# Altium PCB 开发板.PcbDoc
Units mil, origin at the board's own origin, x right, y up, seen from the top; angles counter-clockwise.
Board outline 3732.01 x 2830 mil, 4 copper layers (Top Layer, Internal Plane 1, Internal Plane 2, Bottom Layer), stack 18.2 mil thick; 39 components, 160 nets, 399 pads, 61 vias.
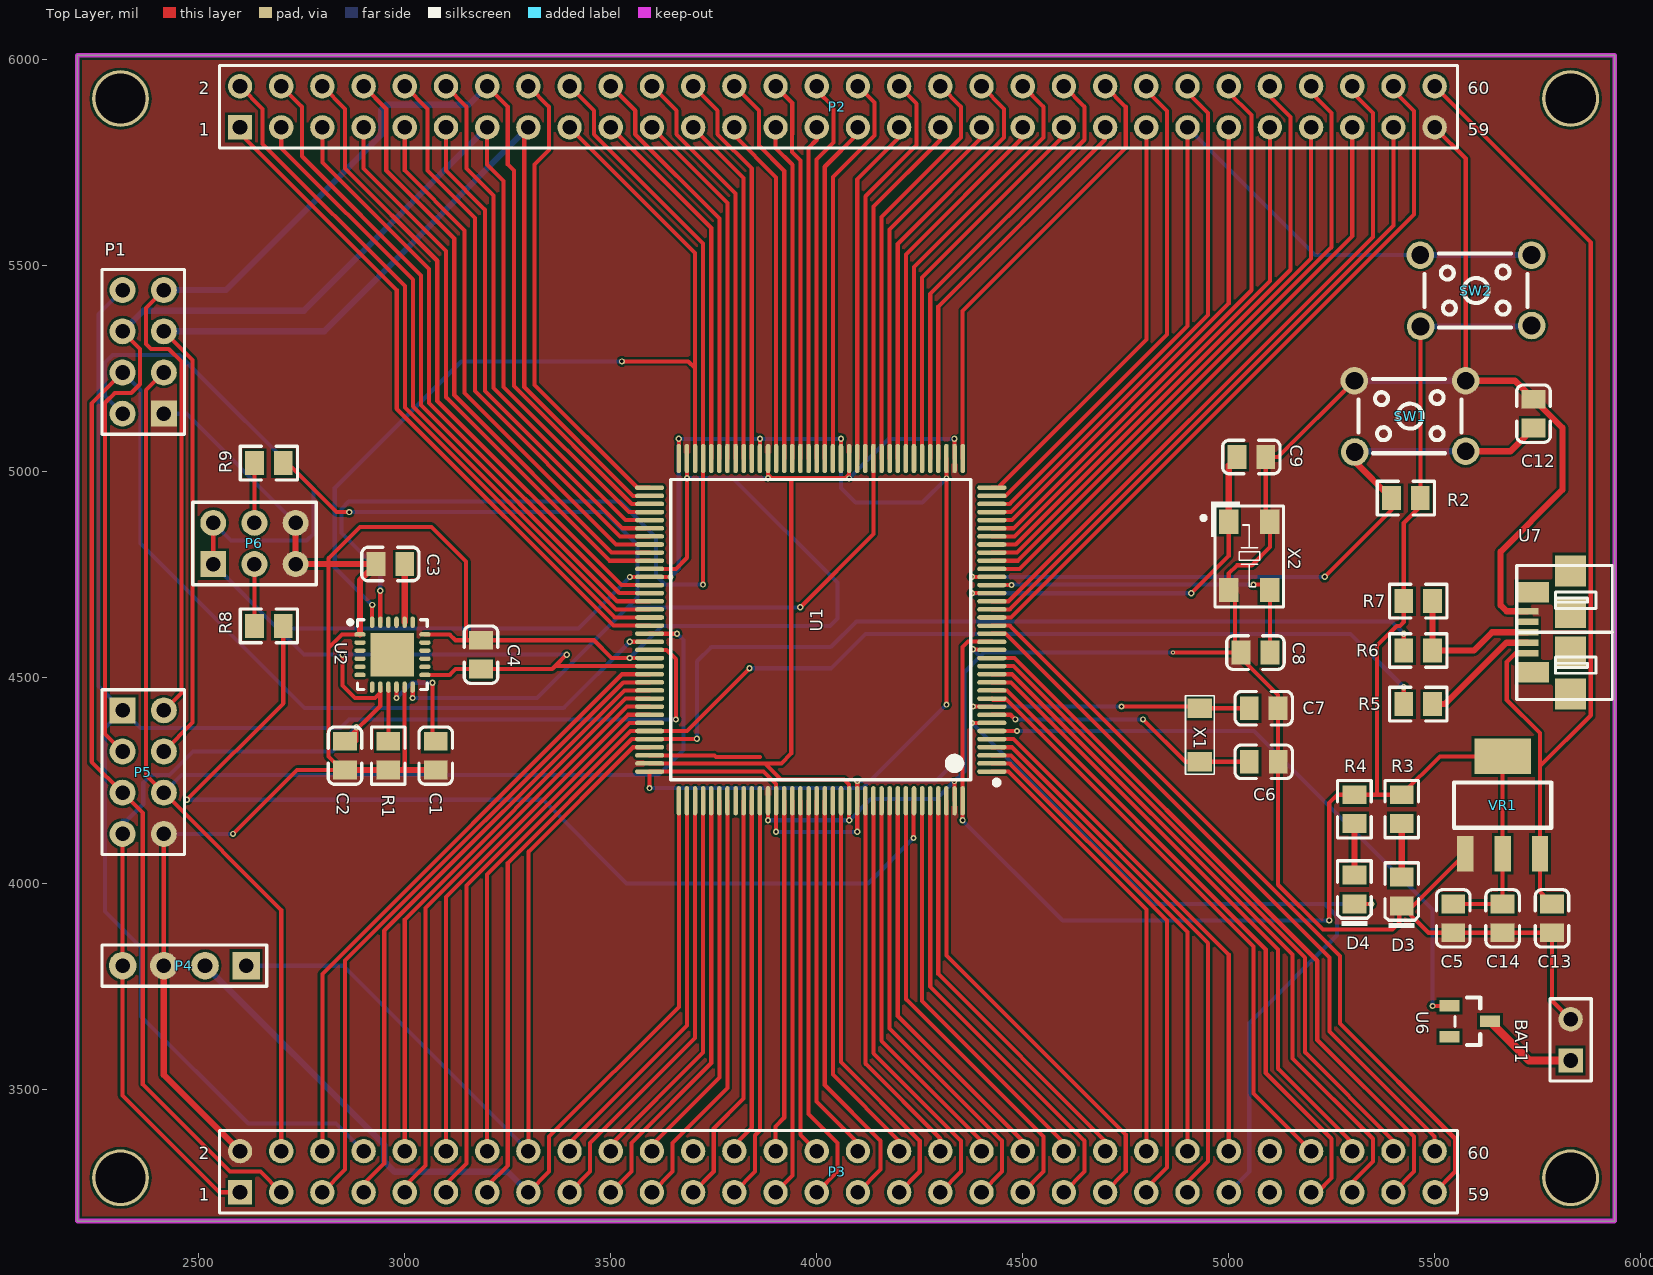
[diagram p0: Top Layer view]
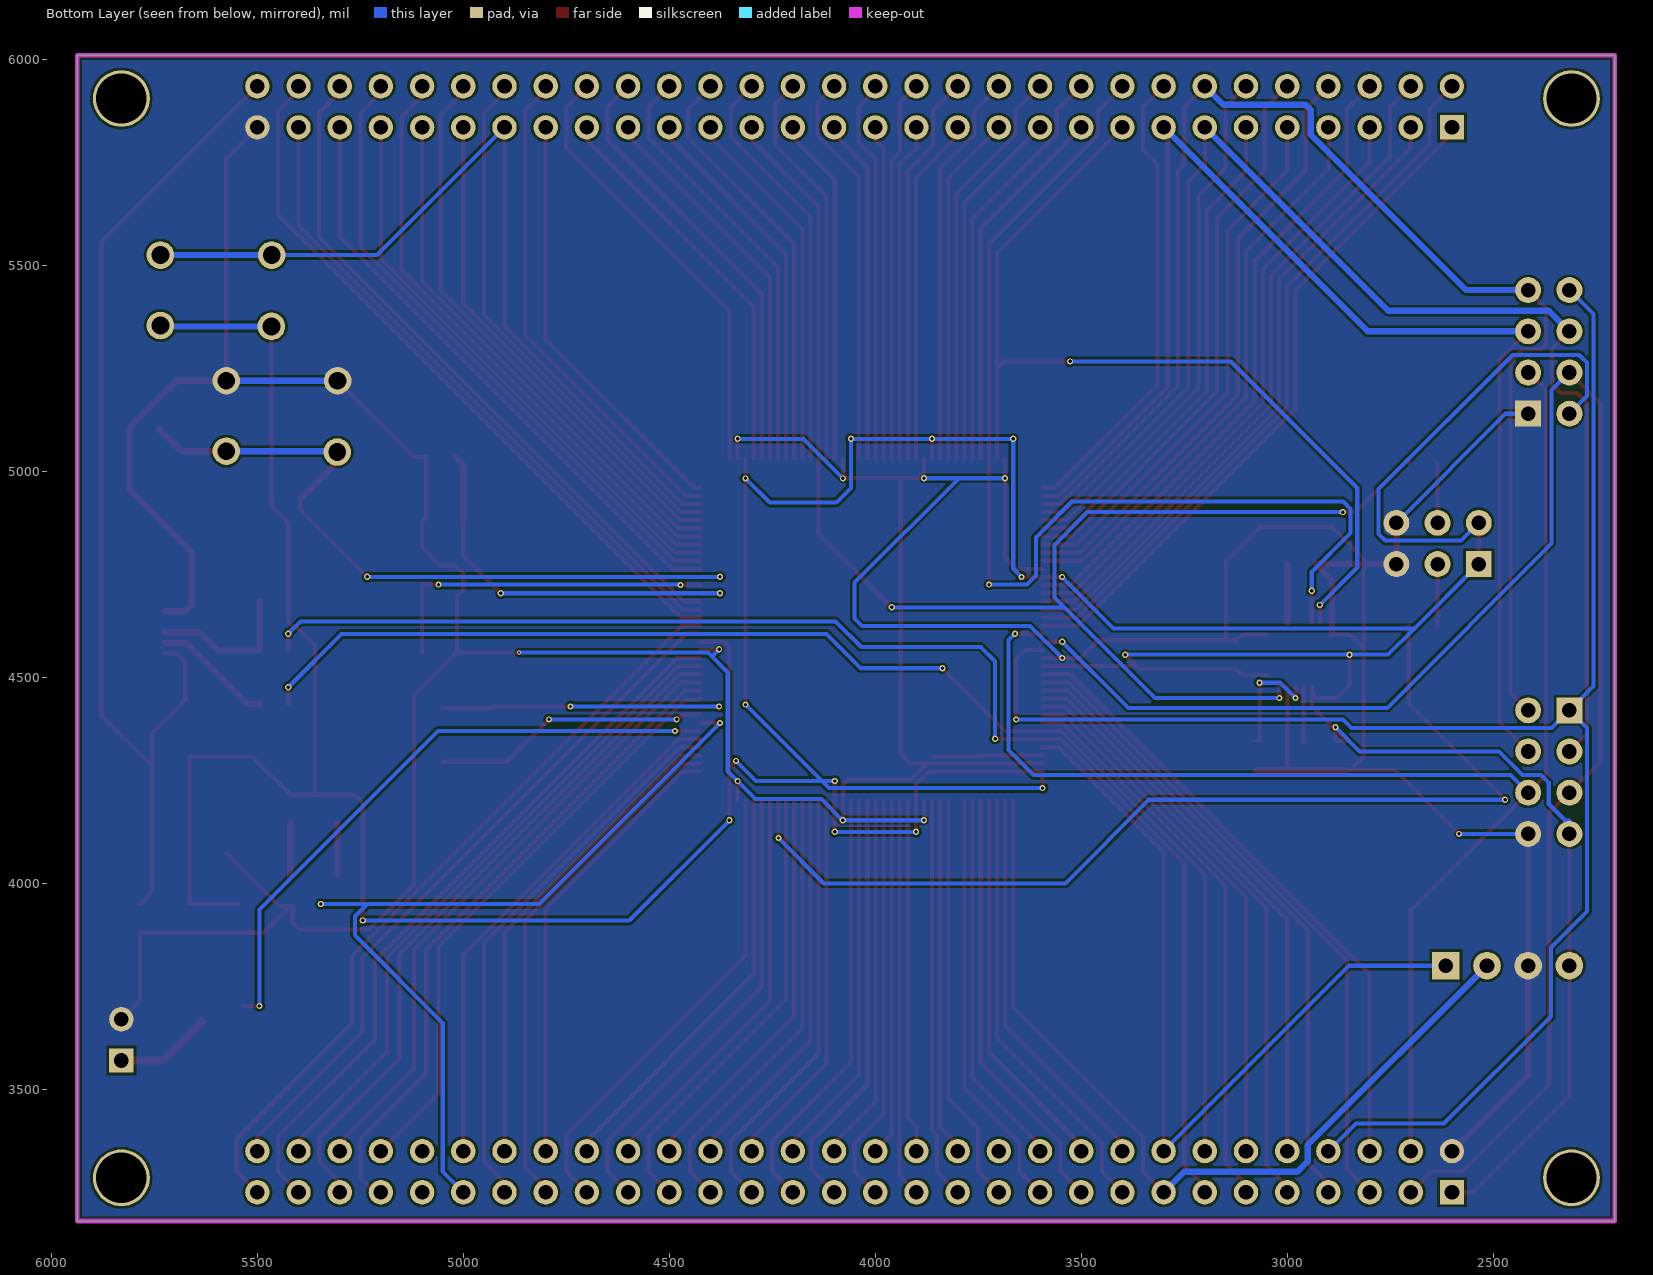
[diagram p1: Bottom Layer view, seen from below]
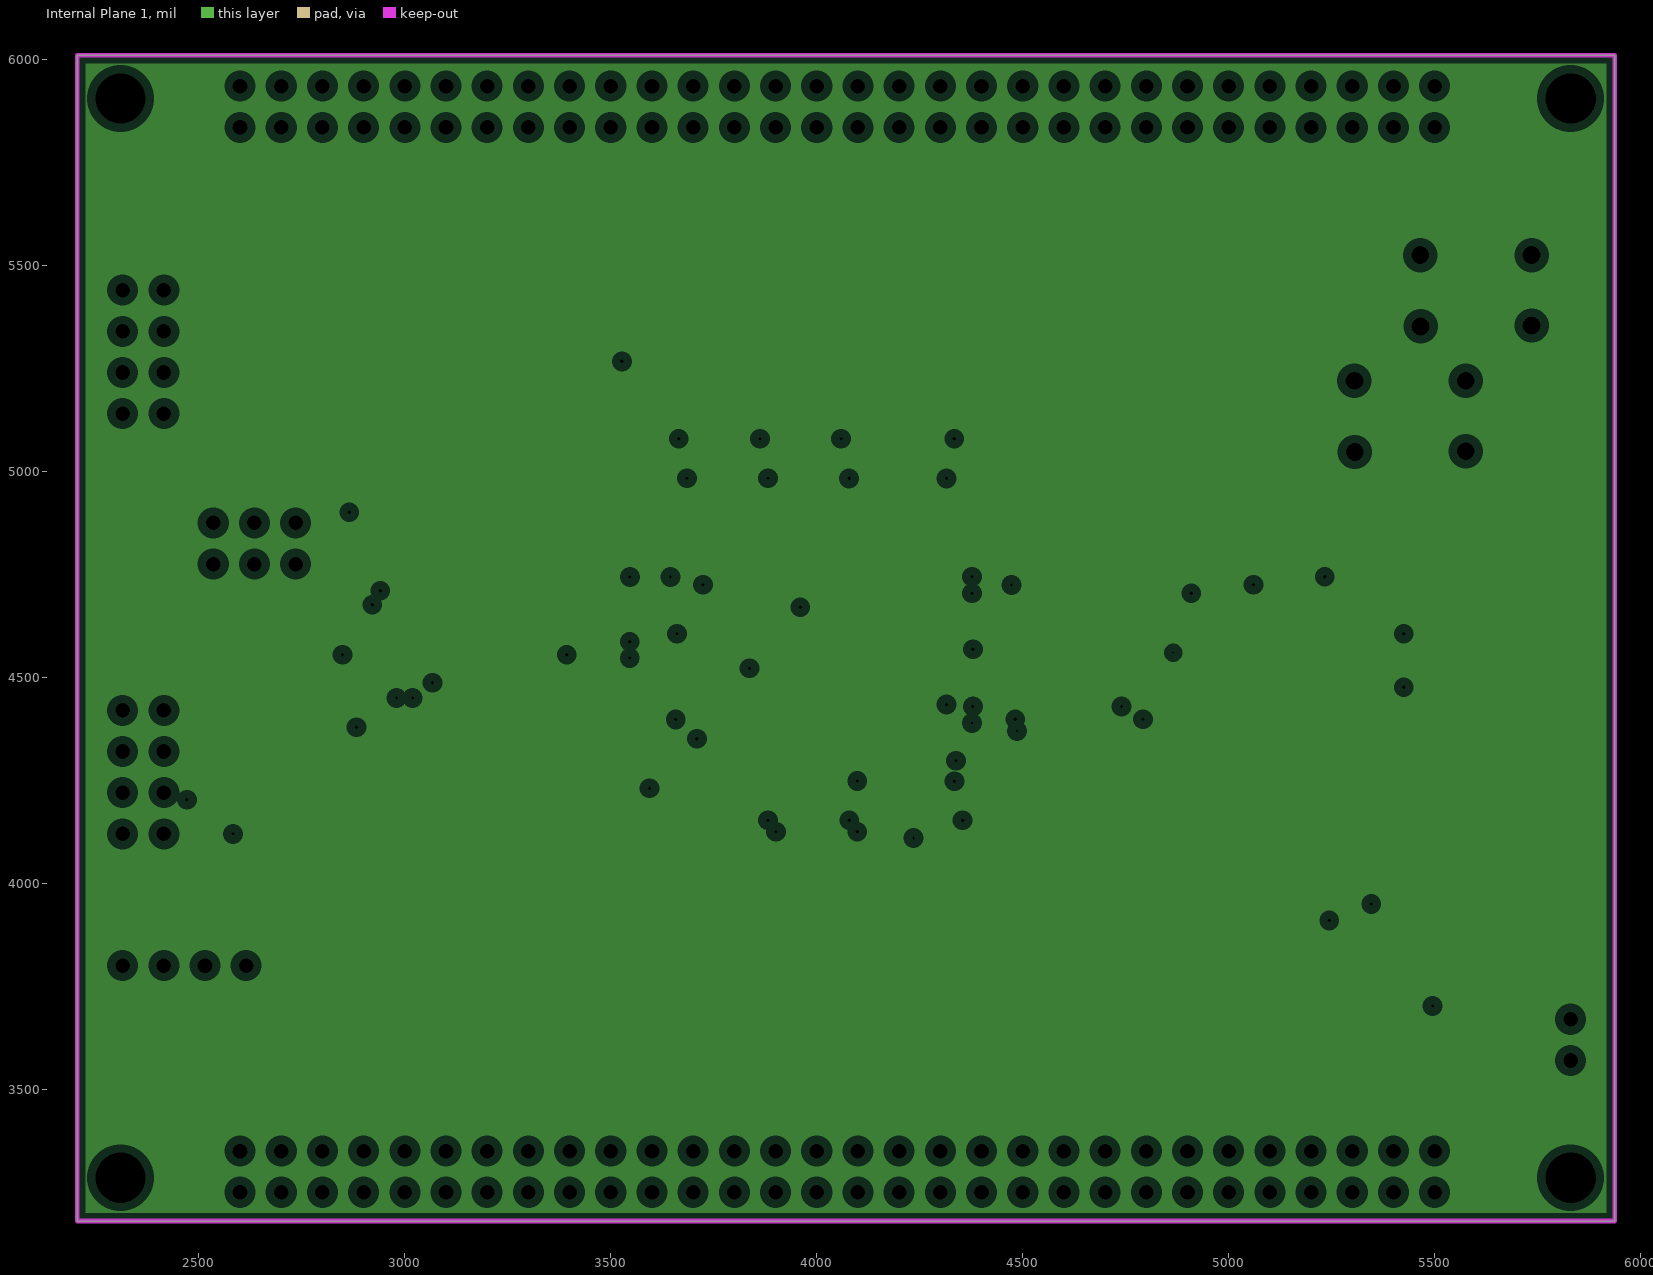
[diagram p2: Internal Plane 1, clearances drawn from the general rule]
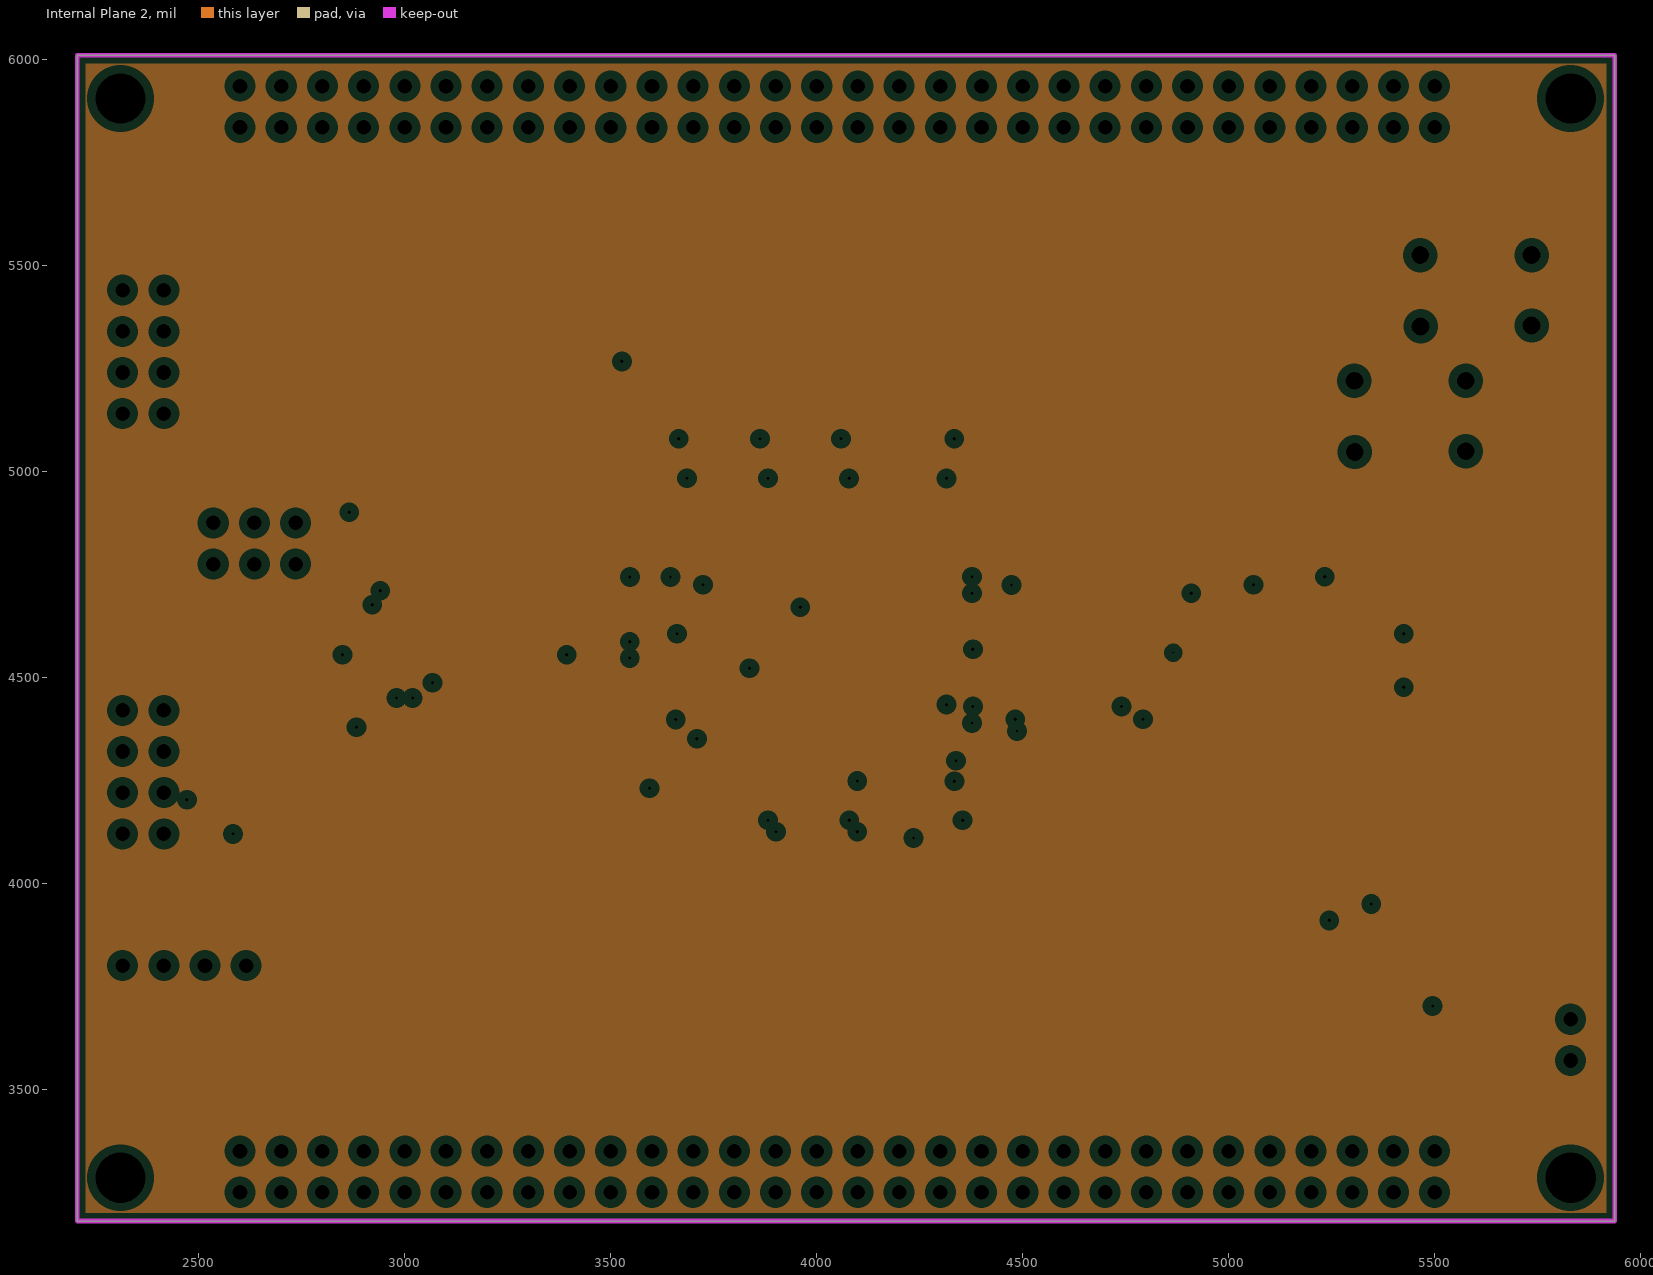
[diagram p3: Internal Plane 2, clearances drawn from the general rule]

## Layer stack, top to bottom
Top Solder: solder mask 0.4, Solder Resist, Dk 3.5
Top Layer: signal copper 1.4
Internal Plane 1: plane copper 1.4
Internal Plane 2: plane copper 1.4
Dielectric 1: dielectric 12.6, FR-4, Dk 4.8
Bottom Layer: signal copper 1.4
Bottom Solder: solder mask 0.4, Solder Resist, Dk 3.5

## Board outline
2205,3180 2205,6010 5937.01,6010 5937.01,3180

## Design rules (kind name [scope] priority, off if disabled: settings)
Clearance [All] p1: gap=6
PlaneClearance [All] p1: clearance=20
PlaneConnect [All] p1: planeconnectstyle=Direct reliefexpansion=20 reliefentries=4 reliefconductorwidth=10 reliefairgap=10
PolygonConnect [All] p1: connectstyle=Direct reliefconductorwidth=10 reliefentries=4 polygonreliefangle="90 Angle" airgapwidth=10
RoutingVias [All] p1: holewidth=10 width=15 viastyle="Through Hole" minholewidth=5 minwidth=10 maxholewidth=28 maxwidth=50
SolderMaskExpansion [All] p1: expansion=4
Width [All] p1: maxlimit=20 minlimit=10 preferedwidth=10 minimp=50.000000 maximp=50.000000 favimp=50.000000
28 further rules are at their usual default settings.

## Components (designator, comment, footprint, x,y, rotation, side; value= is the part's Value field where it differs from the comment)
BAT1 "Battery" HDR1X2 5830,3570 r90 top
C1 "Cap" 0805_C 3075,4310 r270 top
C2 "Cap" 0805_C 2855,4310.04 r270 top
C3 "Cap" 0805_C 2965.04,4775 r180 top
C4 "Cap" 0805_C 3185,4555 r90 top
C5 "Cap" 0805_C 5545,3915 r90 top
C6 "Cap" 0805_C 5085.04,4295 r180 top
C7 "Cap" 0805_C 5085,4425 r180 top
C8 "Cap" 0805_C 5064.96,4560 r0 top
C9 "Cap" 0805_C 5055,5035 r180 top
C12 "Cap" 0805_C 5740,5139.96 r90 top
C13 "Cap" 0805_C 5785,3915 r90 top
C14 "Cap" 0805_C 5665,3915 r90 top
D3 "LED3" 0805_LED_S1 5420,3980 r90 top
D4 "LED3" 0805_LED_S1 5305,3985 r90 top
P1 "Header 4X2" HDR-4X2 2415,5140 r90 top
P2 "Header 30X2" HDR2X30 2600,5835 r0 top
P3 "Header 30X2" HDR2X30 2600,3250 r0 top
P4 "SWD Interface" HDR-1X4 2615,3800 r180 top
P5 "NRF24L01 Extended Interface" HDR-4X2 2315,4420 r270 top
P6 "Header 3X2" HDR-3X2 2535,4775 r0 top
R1 "Res2" 0805_R 2960,4310 r90 top
R2 "Res2" 0805_R 5430,4935 r180 top
R3 "Res2" 0805_R 5420,4180.04 r270 top
R4 "Res2" 0805_R 5305,4180 r270 top
R5 "Res2" 0805_R 5460.04,4435 r0 top
R6 "Res2" 0805_R 5460.04,4565 r180 top
R7 "Res2" 0805_R 5460.04,4685 r180 top
R8 "Res2" 0805_R 2670,4625 r180 top
R9 "Res2" 0805_R 2670,5020 r0 top
SW1 "SW-PB" BUTTON_6*6 5575.37,5049 r180 top
SW2 "SW-PB" BUTTON_6*6 5735.37,5354 r180 top
U1 "Component_1" LQFP-144_20x20x05P 4009.65,4615.79 r90 top
U2 "MPU6050" MPU-6050 2970,4555 r270 top
U6 "BAT54C" BAT54C 5585,3665 r180 top
U7 "USB" USB-MICRO 5777.5,4609 r90 top
VR1 "AMS1117-3.3" 1117 5665,4190 r270 top
X1 "32.768K-3215" XTAL-3215 4930,4360 r90 top
X2 "8MHz-5032" XTAL-5032 5050,4795 r270 top

## Footprints (in the part's own frame and the unit in brackets; to place one, negate y for a bottom-side part, rotate by r counter-clockwise, add the part's x,y. Pads: shape width x height; smd on the part's side, far side on the other; paste and mask are expansions set on the pad)
0805_C [mm]
  rect 1.16x1.47 smd: 1(-0.89,0) 2(0.89,0)
  silkscreen extent -1.77,-1.04 1.77,1.04, body extent -1,-0.62 1,0.63, height 0.77
0805_LED_S1 [mm]
  rect 1.16x1.47 smd: 1(0.89,0) 2(-0.89,0)
  silkscreen extent -2.24,-1.03 1.77,1.03, body extent -1.01,-0.62 1.01,0.62, height 1.1
0805_R [mm]
  rect 1.16x1.47 smd: 1(-0.89,0) 2(0.89,0)
  silkscreen extent -1.77,-1.03 1.77,1.03, body extent -1,-0.62 1,0.63, height 0.49
1117 [mm]
  rect 2.2x1 smd: 1(3,-2.3) 2(3,0) 3(3,2.3)
  rect 2.2x3.5 smd: 2(-3,0)
  silkscreen extent -1.4,-3 1.4,3, body extent -3.49,-3.24 3.49,3.24, height 1.64
BAT54C [mm]
  rect 1.25x0.7 smd: 1(1.25,-0.95) 2(1.25,0.95) 3(-1.25,0)
  silkscreen extent -0.65,-1.46 0.9,1.46, body extent -1.5,-1.5 1.5,1.5, height 1.3
BUTTON_6*6 [mm] "轻触按键"
  round 1.7 hole 1.1: 1(0,0) 1(6.842,0.051) 2(0,-4.343) 2(6.867,-4.343)
  silkscreen extent 0.25,-4.44 6.6,0.13, body extent -0.48,-5.01 7.49,0.99, height 5.26
HDR1X2 [mm] "Connector; Header; 2 Position"
  rect 1.5x1.5 hole 0.9: 1(0,0)
  round 1.5 hole 0.9: 2(2.54,0)
  silkscreen extent -1.27,-1.27 3.81,1.27
HDR2X30 [mm] "Connector; Header; 30x2 Position"
  rect 1.5x1.5 hole 0.9: 1(0,0)
  round 1.5 hole 0.9: 2(0,2.54) 3(2.54,0) 4(2.54,2.54) 5(5.08,0) 6(5.08,2.54) 7(7.62,0) 8(7.62,2.54) 9(10.16,0) 10(10.16,2.54) 11(12.7,0) 12(12.7,2.54) 13(15.24,0) 14(15.24,2.54) 15(17.78,0) 16(17.78,2.54) 17(20.32,0) 18(20.32,2.54) 19(22.86,0) 20(22.86,2.54) 21(25.4,0) 22(25.4,2.54) 23(27.94,0) 24(27.94,2.54) 25(30.48,0) 26(30.48,2.54) 27(33.02,0) 28(33.02,2.54) 29(35.56,0) 30(35.56,2.54) 31(38.1,0) 32(38.1,2.54) 33(40.64,0) 34(40.64,2.54) 35(43.18,0) 36(43.18,2.54) 37(45.72,0) 38(45.72,2.54) 39(48.26,0) 40(48.26,2.54) 41(50.8,0) 42(50.8,2.54) 43(53.34,0) 44(53.34,2.54) 45(55.88,0) 46(55.88,2.54) 47(58.42,0) 48(58.42,2.54) 49(60.96,0) 50(60.96,2.54) 51(63.5,0) 52(63.5,2.54) 53(66.04,0) 54(66.04,2.54) 55(68.58,0) 56(68.58,2.54) 57(71.12,0) 58(71.12,2.54) 59(73.66,0) 60(73.66,2.54)
  silkscreen extent -1.27,-1.27 75.06,3.81
HDR-1X4 [mm] "排针，4脚"
  rect 1.7x1.7 hole 0.9: 1(0,0)
  round 1.7 hole 0.9: 2(2.54,0) 3(5.08,0) 4(7.62,0)
  silkscreen extent -1.27,-1.27 8.89,1.27, body extent -1.27,-1.27 8.89,1.27, height 8.5
HDR-3X2 [mm] "双排排针，3x2脚"
  rect 1.6x1.6 hole 0.9: 1(0,0)
  round 1.6 hole 0.9: 2(0,2.54) 3(2.54,0) 4(2.54,2.54) 5(5.08,0) 6(5.08,2.54)
  silkscreen extent -1.27,-1.27 6.35,3.81, body extent -1.27,-1.27 6.35,3.81, height 8.5
HDR-4X2 [mm] "双排排针，4x2脚"
  rect 1.6x1.6 hole 0.9: 1(0,0)
  round 1.6 hole 0.9: 2(0,2.54) 3(2.54,0) 4(2.54,2.54) 5(5.08,0) 6(5.08,2.54) 7(7.62,0) 8(7.62,2.54)
  silkscreen extent -1.27,-1.27 8.89,3.81, body extent -1.27,-1.27 8.89,3.81, height 8.5
LQFP-144_20x20x05P [mm]
  oval 0.28x1.8 smd mask+0.051: 1(-8.75,-10.55) 2(-8.25,-10.55) 3(-7.75,-10.55) 4(-7.25,-10.55) 5(-6.75,-10.55) 6(-6.25,-10.55) 7(-5.75,-10.55) 8(-5.25,-10.55) 9(-4.75,-10.55) 10(-4.25,-10.55) 11(-3.75,-10.55) 12(-3.25,-10.55) 13(-2.75,-10.55) 14(-2.25,-10.55) 15(-1.75,-10.55) 16(-1.25,-10.55) 17(-0.75,-10.55) 18(-0.25,-10.55) 19(0.25,-10.55) 20(0.75,-10.55) 21(1.25,-10.55) 22(1.75,-10.55) 23(2.25,-10.55) 24(2.75,-10.55) 25(3.25,-10.55) 26(3.75,-10.55) 27(4.25,-10.55) 28(4.75,-10.55) 29(5.25,-10.55) 30(5.75,-10.55) 31(6.25,-10.55) 32(6.75,-10.55) 33(7.25,-10.55) 34(7.75,-10.55) 35(8.25,-10.55) 36(8.75,-10.55) 73(8.75,10.55) 74(8.25,10.55) 75(7.75,10.55) 76(7.25,10.55) 77(6.75,10.55) 78(6.25,10.55) 79(5.75,10.55) 80(5.25,10.55) 81(4.75,10.55) 82(4.25,10.55) 83(3.75,10.55) 84(3.25,10.55) 85(2.75,10.55) 86(2.25,10.55) 87(1.75,10.55) 88(1.25,10.55) 89(0.75,10.55) 90(0.25,10.55) 91(-0.25,10.55) 92(-0.75,10.55) 93(-1.25,10.55) 94(-1.75,10.55) 95(-2.25,10.55) 96(-2.75,10.55) 97(-3.25,10.55) 98(-3.75,10.55) 99(-4.25,10.55) 100(-4.75,10.55) 101(-5.25,10.55) 102(-5.75,10.55) 103(-6.25,10.55) 104(-6.75,10.55) 105(-7.25,10.55) 106(-7.75,10.55) 107(-8.25,10.55) 108(-8.75,10.55)
  oval 1.8x0.28 smd mask+0.051: 37(10.55,-8.75) 38(10.55,-8.25) 39(10.55,-7.75) 40(10.55,-7.25) 41(10.55,-6.75) 42(10.55,-6.25) 43(10.55,-5.75) 44(10.55,-5.25) 45(10.55,-4.75) 46(10.55,-4.25) 47(10.55,-3.75) 48(10.55,-3.25) 49(10.55,-2.75) 50(10.55,-2.25) 51(10.55,-1.75) 52(10.55,-1.25) 53(10.55,-0.75) 54(10.55,-0.25) 55(10.55,0.25) 56(10.55,0.75) 57(10.55,1.25) 58(10.55,1.75) 59(10.55,2.25) 60(10.55,2.75) 61(10.55,3.25) 62(10.55,3.75) 63(10.55,4.25) 64(10.55,4.75) 65(10.55,5.25) 66(10.55,5.75) 67(10.55,6.25) 68(10.55,6.75) 69(10.55,7.25) 70(10.55,7.75) 71(10.55,8.25) 72(10.55,8.75) 109(-10.55,8.75) 110(-10.55,8.25) 111(-10.55,7.75) 112(-10.55,7.25) 113(-10.55,6.75) 114(-10.55,6.25) 115(-10.55,5.75) 116(-10.55,5.25) 117(-10.55,4.75) 118(-10.55,4.25) 119(-10.55,3.75) 120(-10.55,3.25) 121(-10.55,2.75) 122(-10.55,2.25) 123(-10.55,1.75) 124(-10.55,1.25) 125(-10.55,0.75) 126(-10.55,0.25) 127(-10.55,-0.25) 128(-10.55,-0.75) 129(-10.55,-1.25) 130(-10.55,-1.75) 131(-10.55,-2.25) 132(-10.55,-2.75) 133(-10.55,-3.25) 134(-10.55,-3.75) 135(-10.55,-4.25) 136(-10.55,-4.75) 137(-10.55,-5.25) 138(-10.55,-5.75) 139(-10.55,-6.25) 140(-10.55,-6.75) 141(-10.55,-7.25) 142(-10.55,-7.75) 143(-10.55,-8.25) 144(-10.55,-8.75)
  silkscreen extent -9.57,-11 9.25,9.25
MPU-6050 [mm]
  rect 2.68x2.68 smd mask+0.051: 0(0,0)
  oval 0.28x0.7 smd mask+0.051: 1(-1.25,-2) 2(-0.75,-2) 3(-0.25,-2) 4(0.25,-2) 5(0.75,-2) 6(1.25,-2) 13(1.25,2) 14(0.75,2) 15(0.25,2) 16(-0.25,2) 17(-0.75,2) 18(-1.25,2)
  oval 0.7x0.28 smd mask+0.051: 7(2,-1.25) 8(2,-0.75) 9(2,-0.25) 10(2,0.25) 11(2,0.75) 12(2,1.25) 19(-2,1.25) 20(-2,0.75) 21(-2,0.25) 22(-2,-0.25) 23(-2,-0.75) 24(-2,-1.25)
  silkscreen extent -2.15,-2.72 2.15,2.15
USB-MICRO [mm]
  rect 1.9x1.9 smd: 0(-3.797,-1.334) 0(-1.206,-1.333) 0(1.232,-1.333) 0(3.797,-1.333)
  rect 1.25x2 smd: 0(-2.451,1.003) 0(2.476,1.003)
  rect 0.4x1.4 smd: 1(-1.283,1.333) 2(-0.635,1.333) 3(0.013,1.333) 4(0.66,1.333) 5(1.308,1.333)
  silkscreen extent -4.13,-3.91 4.13,1.99, body extent -4.1,-3.91 4.1,2.02, height 2.77
XTAL-3215 [mm]
  rect 1.2x1.5 smd: 1(-1.65,0) 2(1.65,0)
  silkscreen extent -2.41,-0.89 2.41,0.89, body extent -1.6,-0.75 1.6,0.75, height 0.81
XTAL-5032 [mm]
  rect 1.5x1.2 smd: 1(-2.108,-1.27) 2(2.108,-1.27) 3(2.108,1.27) 4(-2.108,1.27)
  silkscreen extent -3.35,-2.95 3.15,2.11, body extent -2.5,-1.6 2.5,1.6, height 1

## Part data
BAT1: "Multicell Battery"
C1 C2 C3 C4 C5 C6 C7 C8 C9 C12 C13 C14: "Capacitor"
D3 D4: "Typical BLUE SiC LED"
P1: "Header, 4-Pin, Dual row"
P2 P3: "Header, 30-Pin, Dual row"
P4: library part MHDR1X4, "Header, 4-Pin"
P5: library part MHDR2X4, "Header, 4-Pin, Dual row"
P6: "Header, 3-Pin, Dual row"
R1 R2 R3 R4 R5 R6 R7 R8 R9: "Resistor"
SW1 SW2: "Switch"
U2 X1 X2: library part Component_1
VR1: library part "AMS1117-3.3 SOT-223", "低压差线性稳压(LDO)"

## Free pads (board coordinates)
  round 137.8 hole 122.05: 0(2310,5905) 1(2310,3285) 2(5830,3285) 2(5830,5905)

## Via types
v1: diameter 15, hole 8, Top Layer to Bottom Layer, 60 vias
v2: diameter 10, hole 5, Top Layer to Bottom Layer, 1 vias

## Nets (pads, with @x,y where several pads share a name; then routed paths per layer and width w, separated by ;. In a path a pad name is that pad's centre, name@x,y a point inside that pad or via, vN(x,y) a via of type N, cw(c..) or ccw(c..) an arc to the next point about the centre after c; other vN are vias at no path point)
3.3V: C2.1 C4.1 C5.2 C14.2 P1.2 P3.1 P4.4 P5.7 P6.1 P6.2 R2.1 R3.1 R4.1 R7.2 SW2.1 U1.17 U1.39 U1.52 U1.62 U1.72 U1.84 U1.95 U1.108 U1.121 U1.131 U1.144 U2.8 U2.13 VR1.2 | length 13936.9
  Top Layer w10: P5.7 P4.4 2315,3485 2550,3250 P3.1 ; P6.1 P6.2 ; v1(2849,4555) 2849,4480 2879.53,4449.47 2928,4449.47 2940.47,4461.94 U2.8 2940.47,4430.55 C2.1 2883,4345.08 v1(2883,4379) ; U2.13 3109,4505.79 3123.17,4519.96 C4.1 3357.96,4519.96 3365.2,4527.2 ; v1(3393,4555) 3365.2,4527.2 ; v1(3546.36,4743.74) U1.84 v1(3645,4743.74) ; v1(3594,4231) 3594,4271.3 U1.108 3870.94,4271.3 3901.38,4240.87 U1.121 3901.38,4125.38 v1(3901,4125) ; U1.95 3365.2,4527.2 ; v1(3665,5079) 3665.16,5078.84 U1.72 ; U1.62 v1(3862.01,5079) ; U1.52 v1@4058.86,5078.86 ; v1@4058.86,5079 v1@4058.86,5078.86 ; v1(4059,5079) v1@4058.86,5078.86 ; v1(4098.23,4125) U1.131 v1(4098.23,4248.37) ; v1(4314.76,4433.76) v1(4314.76,4983) U1.39 ; v1(4338.13,4297.27) 4354.13,4281.27 ; v1(4354.13,4153) U1.144 4354.13,4281.27 ; U1.17 4397.57,4586.26 4397.57,4586.59 4367.08,4586.59 4354.13,4573.65 4354.13,4281.27 ; v1(5244,3910) 5244,4195.04 5264,4215.04 R4.1 5362,4215.04 5362.04,4215.08 ; SW2.1@5466,5352 5466,4935.96 R2.1 5465.04,4915.04 5425,4875 R7.2 5425,4634 5416,4625 5408,4625 5360,4577 5360,4215.08 5362.04,4215.08 ; C5.2 C14.2 5665,4071.89 5665,4308.11 5513.03,4308.11 R3.1 5362.04,4215.08
  Bottom Layer w10: P5.7 2315,4152 2325,4152 2365,4192 2365,4244 2384,4263 2429,4263 2486,4320 2824,4320 v1(2883,4379) ; P1.2 2272.5,5182.5 2272.5,5264 2291,5282.5 2452.5,5282.5 2778,4957 2778,4848 2762,4832 2578,4832 P6.2 ; P6.1 2691,4619 ; v1(3393,4555) v1(2849,4555) 2755,4555 2691,4619 ; v1(3546.36,4743.74) 3421.62,4619 2691,4619 ; v1(3594,4231) 4112,4231 4129.37,4248.37 ; v1(3645,4743.74) 3665,4763.74 3665,5078.68 3665.32,5079 v1(3862.01,5079) v1@4058.86,5079 ; v1(3901,4125) v1(4098.23,4125) ; v1(4059,5079) v1@4058.86,5079 ; v1(4098.23,4248.37) 4129.37,4248.37 ; v1(4314.76,4433.76) 4129.37,4248.37 ; v1(4314.76,4983) 4256.05,4924.28 4094.57,4924.28 4058.86,4960 v1@4058.86,5079 ; v1(4338.13,4297.27) 4289.24,4248.37 4129.37,4248.37 ; v1(4354.13,4153) 4597.13,3910 v1(5244,3910)
  Bottom Layer w15: SW2.1@5466,5352 5733.37,5352 SW2.1@5735.37,5354
5V: C13.2 P2.60 U7.1 VR1.3 | length 2550.3
  Top Layer w10: P2.60 5879,5556 5879,4408 5755.55,4284.55 ; U7.1 5696,4558.5 5675,4537.5 5675,4445 5755.55,4364.45 5755.55,4284.55 ; C13.2 5755.55,3979.49 VR1.3 5755.55,4284.55
BAT: U1.6 U6.1 | length 1524
  Top Layer w10: U1.6 v1(4486,4369.72) ; v1(5495,3702.4) U6.1
  Bottom Layer w10: v1(4486,4369.72) 5061.28,4369.72 5495,3936 v1(5495,3702.4)
BOOT0: R8.1 U1.138 | length 2503.4
  Top Layer w10: v1(2471,4203) 2705.04,4437.04 R8.1 ; v1(4235,4110) 4235,4199.41 U1.138
  Bottom Layer w10: v1(2471,4203) 3335,4203 3538,4000 4125,4000 v1(4235,4110)
BOOT1: P2.35 R9.2 U1.48 U2.12 | length 3481.7
  Top Layer w10: R9.2 2705.04,5029.96 2834,4901 v1(2865,4901) ; v1(3019,4450) 3019.21,4450.21 U2.12 ; v1(3960,4670) 4137.6,4847.6 U1.48 4137.6,5642.6 4300,5805 P2.35
  Bottom Layer w10: v1(2865,4901) 3485,4901 3565,4821 3565,4694 3541,4670 ; v1(3019,4450) 3321,4450 3541,4670 ; v1(3960,4670) 3541,4670
GND: BAT1.2 C1.2 C2.2 C3.2 C4.2 C5.1 C6.1 C7.1 C8.1 C9.1 C12.2 C13.1 C14.1 D3.2 P1.1 P2.59 P3.2 P4.3 P5.8 P6.5 P6.6 R1.1 SW1.2 U1.16 U1.38 U1.51 U1.61 U1.71 U1.83 U1.94 U1.107 U1.120 U1.130 U1.143 U2.1 U2.11 U2.18 U7.5 VR1.1 X2.2 X2.4 | length 14157.2
  Top Layer w10: P4.3 P5.8 ; v1(2583,4120) 2738,4275 C2.2@2847.96,4275 ; C2.2 C2.2@2847.96,4275 ; U2.1 2848,4604.21 2815,4571.21 ; U2.11 2999.53,4379 3000,4378.53 3000,4282.96 2992,4274.96 R1.1 C2.2 2848,4274.96 C2.2@2847.96,4275 ; U2.18 3109,4604.21 3123.17,4590.04 3148.96,4590.04 ; v1(3546,4547) v1@3546.11,4546.89 ; U1.107 3873.89,4290.98 ; U1.94 v1@3546.11,4546.89 ; U1.83 3658,4763.43 3684.84,4790.27 v1(3684.84,4983.16) U1.71 ; v1(3881.69,4153) U1.120 ; v1(3881.69,4983.16) 3881.69,4992 ; U1.61 3881.69,4992 ; v1(4078.54,4983) 4078.54,4992 ; U1.51 4078.54,4992 ; v1(4079,4153) 4078.54,4153.46 U1.130 4078.54,4240 4066.36,4252.18 3912.69,4252.18 3873.89,4290.98 ; v1(4334,4248) v1@4334.45,4247.55 ; v1(4334,5079) 4334.45,5078.55 U1.38 ; U1.143 v1@4334.45,4247.55 ; v1(4334.45,4248) v1@4334.45,4247.55 ; v1(4379,4568) 4389.57,4568 U1.16 ; v2@4864,4560 v2(4865,4560) C8.1@5014.92,4560 ; SW1.2@5305,5220 5120,5035 C9.1 5090.04,4887.96 X2.4 5100,4816 5056,4772 5020,4772 5000,4752 X2.2 5014.92,4697.08 C8.1@5014.92,4560 ; P2.59 5575.37,5759.63 SW1.2@5575.37,5220 ; VR1.1 5447.52,3944.96 D3.2 ; BAT1.2 5785,3715 C13.1 C14.1 C5.1 5485,3879.96 D3.2 ; 2815,4571.21 2815,4307.96 C2.2@2847.96,4275 ; 2815,4571.21 2815,4789 2891,4865 3065,4865 3148.96,4781.04 3148.96,4590.04 ; 3148.96,4590.04 C4.2 3458.85,4590.04 3502,4546.89 v1@3546.11,4546.89 ; 3873.89,4290.98 3914,4290.98 3938,4314.98 3938,4983.46 ; 3881.69,4992 3890.24,4983.46 3938,4983.46 ; 3938,4983.46 4070,4983.46 4078.54,4992 ; C8.1@5014.92,4560 5016.26,4555.73 5021.27,4555.73 5120.04,4456.96 C7.1 5120.04,4359.04 5120.08,4359 C6.1 5120.08,3996.56 5228.63,3888 5398,3888 5414,3904 5414,3944.96 D3.2
  Top Layer w15: P4.3 2415,3535 P3.2 ; P6.6 P6.5 C3.2 2891.26,4736.26 U2.1 ; C2.2 C2.2 R1.1 C1.2 ; SW1.2@5575.37,5220 5695,5220 C12.2 5740.78,5175 5810,5105.78 5810,4955 5660,4805 5660,4675 5674.5,4660.5 U7.5
  Bottom Layer w10: P5.8 v1(2583,4120) ; P1.1 2470,5140 P6.6 ; v1(3546,4547) 3624,4625 4032,4625 4050,4643 4050,4730 3796.84,4983.16 ; v1(3684.84,4983.16) 3796.84,4983.16 ; v1(3881.69,4153) v1(4079,4153) 4131,4205 4291,4205 v1(4334,4248) ; v1(3881.69,4983.16) 3796.84,4983.16 ; v1(4078.54,4983) 4174.54,5079 v1(4334,5079) ; v1(4334.45,4248) 4358,4271.55 4358,4512 4396.5,4550.5 ; v1(4379,4568) 4396.5,4550.5 ; v2(4865,4560) 4406,4560 4396.5,4550.5
  Bottom Layer w15: SW1.2@5305,5220 SW1.2@5575.37,5220
INP1: 
INP2: 
INP3: 
INP4: 
KEY0: P3.59 U1.19 | length 1887.7
  Top Layer w10: U1.19 4468.38,4625.63 5270,3824.01 5270,3660 5550,3380 5550,3300 P3.59
KEY1: P3.60 U1.18 | length 1720.9
  Top Layer w10: U1.18 4458.59,4605.94 5245,3819.53 5245,3640 5500,3385 P3.60
NetBAT1_1: BAT1.1 U6.3 | length 235.1
  Top Layer w20: U6.3 5729.21,3570 BAT1.1
NetC1_1: C1.1 U2.10 | length 278.6
  Top Layer w10: U2.10 2979.84,4450.16 v1(2980,4450) ; v1(3067,4487) 3067,4345.04 C1.1
  Bottom Layer w10: v1(2980,4450) 3017,4487 v1(3067,4487)
NetC3_1: C3.1 U2.20 | length 141.5
  Top Layer w15: U2.20 3000.08,4634.29 C3.1
NetD3_1: D3.1 R3.2 | length 130
  Top Layer w15: D3.1 R3.2
NetD4_1: D4.1 R4.2 | length 124.9
  Top Layer w15: D4.1 R4.2
NetD5_2: 
NetD17_2: 
NetP6_3: P6.3 R8.2 | length 150
  Top Layer w10: R8.2 R8.2 P6.3
NetP6_4: P6.4 R9.1 | length 145
  Top Layer w10: R9.1 P6.4 P6.4
NetR1_2: R1.2 U2.9 | length 131.3
  Top Layer w10: R1.2@2960.16,4345.2 U2.9
  Top Layer w15: R1.2 R1.2@2960.16,4345.2
NetR5_2: R5.2 U7.2 | length 291.6
  Top Layer w15: R5.2 5525,4435 5674,4584 U7.2
NetR6_1: R6.1 R7.1 U7.3 | length 368.4
  Top Layer w15: R7.1 R6.1 5595,4565 5639.5,4609.5 U7.3
OUP1: 
OUP2: 
OUP3: 
OUP4: 
PA0: P2.47 SW2.2 U1.34 | length 2100
  Top Layer w10: U1.34 4468.38,4920.91 4900,5352.53 P2.47
  Bottom Layer w10: P2.47 5210,5525 SW2.2@5465,5525
  Bottom Layer w15: SW2.2@5465,5525 SW2.2@5735.37,5525
PA1: P2.46 U1.35 | length 1210.8
  Top Layer w10: U1.35 4458.59,4940.59 4850,5332 4850,5875 4800,5925 P2.46
PA2: P2.45 U1.36 | length 1039
  Top Layer w10: U1.36 4440.28,4960.28 4800,5320 P2.45
PA3: P2.44 U1.37 | length 1088.5
  Top Layer w10: U1.37 4354.13,5389.13 4750,5785 4750,5885 P2.44
PA4: P2.43 U1.40 | length 971.6
  Top Layer w10: U1.40 4295.08,5400.08 4700,5805 P2.43
PA5: P2.42 U1.41 | length 1079.7
  Top Layer w10: U1.41 4275.39,5430.39 4650,5805 4650,5885 P2.42
PA6: P2.41 U1.42 | length 946.5
  Top Layer w10: U1.42 4255.71,5470.71 4600,5815 P2.41
PA7: P2.40 U1.43 | length 1054.6
  Top Layer w10: U1.43 4236.02,5496.02 4550,5810 4550,5885 P2.40
PA8: P3.9 U1.100 | length 1457.2
  Top Layer w10: P3.9 3000,3265 3050,3315 3050,3939.63 3539.15,4428.78 U1.100
PA9: P3.12 U1.101 | length 1294.4
  Top Layer w10: P3.12 3100,3967.01 3542.09,4409.09 U1.101
PA10: P3.11 U1.102 | length 1373
  Top Layer w10: P3.11 3100,3270 3150,3320 3150,3994.38 3545.03,4389.41 U1.102
PA11: P3.14 R5.1 U1.103 | length 3232.8
  Top Layer w10: P3.14 3200,4021.75 3547.97,4369.72 U1.103 3684.72,4369.72 v1(3837,4522) ; R5.1 v1(5425,4476)
  Bottom Layer w10: v1(3837,4522) 4035,4522 4118,4605 5296,4605 v1(5425,4476)
PA12: P3.13 R6.2 U1.104 | length 3401.5
  Top Layer w10: P3.13 3200,3265 3250,3315 3250,4049.12 3550.92,4350.04 U1.104 3708.04,4350.04 v1(3709,4351) ; R6.2 v1(5425,4606)
  Bottom Layer w10: v1(3709,4351) 3709,4539 3744,4574 4034,4574 4096,4636 5395,4636 v1(5425,4606)
PA13: P3.16 P4.1 U1.105 | length 1997.3
  Top Layer w10: P3.16 3300,4076.5 3553.86,4330.35 U1.105
  Bottom Layer w10: P4.1 2850,3800 P3.16
PA14: P3.15 P4.2 U1.109 | length 2137.9
  Top Layer w10: P3.15 3350,3300 3350,3385 3665.16,3700.16 U1.109
  Bottom Layer w15: P4.2 2950,3365 2950,3325 2975,3300 3250,3300 P3.15
PA15: P3.18 U1.110 | length 968.4
  Top Layer w10: P3.18 3400,3370 3684.84,3654.84 U1.110
PB0: P2.37 U1.46 | length 896.2
  Top Layer w10: U1.46 4176.97,5586.97 4400,5810 P2.37
PB1: P2.36 U1.47 | length 1004.4
  Top Layer w10: U1.47 4157.28,5617.28 4350,5810 4350,5885 P2.36
PB3: P3.35 U1.133 | length 1059.1
  Top Layer w10: U1.133 4137.6,3587.4 4350,3375 4350,3300 P3.35
PB4: P3.38 U1.134 | length 951
  Top Layer w10: U1.134 4157.28,3617.72 4400,3375 P3.38
PB5: P3.37 U1.135 | length 1084.2
  Top Layer w10: U1.135 4176.97,3648.03 4450,3375 4450,3300 P3.37
PB6: P3.40 U1.136 | length 976.1
  Top Layer w10: U1.136 4196.65,3678.35 4500,3375 P3.40
PB7: P3.39 U1.137 | length 1109.4
  Top Layer w10: U1.137 4216.34,3718.66 4550,3385 4550,3300 P3.39
PB8: P3.42 U1.139 | length 993
  Top Layer w10: U1.139 4255.71,3714.29 4600,3370 P3.42
PB9: P3.41 U1.140 | length 1126.3
  Top Layer w10: U1.140 4275.39,3749.61 4650,3375 4650,3300 P3.41
PB10: P2.18 U1.69 U2.23 | length 2682.4
  Top Layer w10: U2.23 v1(2940.47,4710) ; P2.18 3459.47,5875.53 3459.47,5818.21 3724.21,5553.47 U1.69 3724.21,4725.21 v1(3724,4725)
  Bottom Layer w10: v1(2940.47,4710) 2940.47,4755.53 2846,4850 2846,4909 2864,4927 3523,4927 3610,4840 3610,4747 3632,4725 v1(3724,4725)
PB11: P2.17 U1.70 U2.24 | length 2521.7
  Top Layer w10: U2.24 v1(2920.79,4676) ; P2.17 3704.53,5530.47 U1.70 3704.53,5250.47 3688,5267 v1(3527,5267)
  Bottom Layer w10: v1(2920.79,4676) 2830,4766.79 2830,4960 3137,5267 v1(3527,5267)
PB12: P2.16 U1.73 | length 1142.9
  Top Layer w10: P2.16 3350,5885 3350,5780 3315,5745 3315,5210 3564.72,4960.28 U1.73
PB13: P1.5 P2.15 P5.4 U1.74 | length 3216.3
  Top Layer w10: P5.4 2485,4390 2485,5270 P1.5 ; P2.15 3290,5825 3290,5204.45 3553.86,4940.59 U1.74
  Bottom Layer w15: P1.5 2805,5340 P2.15
PB14: P1.7 P2.14 P5.2 U1.75 | length 3344.5
  Top Layer w10: P5.2 2457.5,4462.5 2457.5,5266.5 2427,5297 2384,5297 2372,5309 2372,5397 P1.7 ; P2.14 3250,5885 3250,5745 3265,5730 3265,5206.82 3550.92,4920.91 U1.75
  Bottom Layer w15: P1.7 2565.85,5440 2943.03,5817.18 2943.03,5878.03 2955,5890 3155,5890 P2.14
PB15: P1.6 P2.13 P5.3 U1.76 | length 3330.6
  Top Layer w10: P5.3 2272.5,4362.5 2272.5,5166.5 2296,5190 2336,5190 2357.5,5211.5 2357.5,5297.5 P1.6 ; P2.13 3200,5745 3240,5705 3240,5205 3543.78,4901.22 U1.76
  Bottom Layer w15: P1.6 2365,5390 2755,5390 P2.13
PC0: 
PC0-L298NA: P2.55 U1.26 | length 1473.2
  Top Layer w10: U1.26 4491.91,4763.43 5300,5571.51 P2.55
PC1: 
PC1-L298NA: P2.54 U1.27 | length 1551.8
  Top Layer w10: U1.27 4488.97,4783.11 5250,5544.14 5250,5870 5200,5920 P2.54
PC2: 
PC2-L298NA: P2.53 U1.28 | length 1389
  Top Layer w10: U1.28 4486.03,4802.8 5200,5516.77 P2.53
PC3: 
PC3-L298NA: P2.52 U1.29 | length 1467.6
  Top Layer w10: U1.29 4483.09,4822.48 5150,5489.39 5150,5860 5100,5910 P2.52
PC4: P2.39 U1.44 | length 921.4
  Top Layer w10: U1.44 4216.34,5526.34 4500,5810 P2.39
PC5: P2.38 U1.45 | length 1033.7
  Top Layer w10: U1.45 4196.65,5551.65 4455,5810 4455,5880 P2.38
PC6: 
PC6-L298NA: P3.6 U1.96 | length 1525.7
  Top Layer w10: P3.6 2800,3780.14 3527.38,4507.52 U1.96
PC7: 
PC7-L298NA: P3.5 U1.97 | length 1604.3
  Top Layer w10: P3.5 2855,3305 2855,3812.52 3530.32,4487.83 U1.97
PC8: 
PC8-L298NB: P3.7 U1.98 | length 1541.5
  Top Layer w10: P3.7 2900,3270 2950,3320 2950,3884.89 3533.26,4468.15 U1.98
PC9: 
PC9-L298NB: P3.10 U1.99 | length 1378.7
  Top Layer w10: P3.10 3000,3912.26 3536.2,4448.46 U1.99
PC10: 
PC10-L298NB: P3.17 U1.111 | length 1076.6
  Top Layer w10: P3.17 3450,3300 3450,3370 3704.53,3624.53 U1.111
PC11: 
PC11-L298NB: P3.20 U1.112 | length 943.3
  Top Layer w10: P3.20 3500,3365 3724.21,3589.21 U1.112
PC12: 
PC12-L298NB: P3.19 U1.113 | length 1051.5
  Top Layer w10: P3.19 3550,3300 3550,3370 3743.9,3563.9 U1.113
PC13: D4.2 P3.49 U1.7 | length 2061.4
  Top Layer w10: v1(4377,4389) 4377.41,4389.41 U1.7 ; D4.2 v1(5346,3950) v1(5346,3950)
  Bottom Layer w10: v1(4377,4389) 4816,3950 5233,3950 ; P3.49 5050,3300 5050,3661 5263,3874 5263,3920 5233,3950 ; v1(5346,3950) 5233,3950
PC14: P3.52
PC15: P3.51
PD0: P3.22 U1.114 | length 918.2
  Top Layer w10: P3.22 3600,3365 3763.58,3528.58 U1.114
PD1: P3.21 U1.115 | length 1026.3
  Top Layer w10: P3.21 3650,3300 3650,3370 3783.27,3503.27 U1.115
PD2: U1.116
PD2-L298NB: P3.24
PD3: P3.23 U1.117 | length 1001.2
  Top Layer w10: P3.23 3750,3300 3750,3405 3822.64,3477.64 U1.117
PD4: P3.26 U1.118 | length 868
  Top Layer w10: P3.26 3800,3365 3842.32,3407.32 U1.118
PD5: P3.25 U1.119 | length 976.1
  Top Layer w10: P3.25 3850,3300 3850,3388.42 3862.01,3400.43 U1.119
PD6: P3.28 U1.122 | length 859.2
  Top Layer w10: P3.28 3900,3410 3921.06,3431.06 U1.122
PD7: P3.27 U1.123 | length 967.3
  Top Layer w10: P3.27 3940.75,3290.75 U1.123
PD8: P2.12 U1.77 | length 1292.3
  Top Layer w10: P2.12 3150,5885 3150,5735 3215,5670 3215,5202.63 3536.09,4881.54 U1.77
PD9: P2.11 U1.78 | length 1216.6
  Top Layer w10: P2.11 3100,5730 3195,5635 3195,5195 3528.15,4861.85 U1.78
PD10: P2.10 U1.79 | length 1380.9
  Top Layer w10: P2.10 3055,5880 3055,5730 3170,5615 3170,5195 3522.83,4842.17 U1.79
PD11: P2.9 U1.80 | length 1306.6
  Top Layer w10: P2.9 3000,5730 3145,5585 3145,5190 3512.52,4822.48 U1.80
PD12: P2.8 U1.81 | length 1473.7
  Top Layer w10: P2.8 2955,5880 2955,5730 3120,5565 3120,5185 3502.2,4802.8 U1.81
PD13: P2.7 U1.82 | length 1396.5
  Top Layer w10: P2.7 2900,5735 3100,5535 3100,5180 3496.89,4783.11 U1.82
PD14: P2.6 U1.85 | length 1580
  Top Layer w10: P2.6 2855,5880 2855,5735 3078.78,5511.22 3078.78,5171.22 3525.94,4724.06 U1.85
PD15: P2.5 U1.86 | length 1502.8
  Top Layer w10: P2.5 2800,5750 3059.09,5490.91 3059.09,5165.91 3520.63,4704.37 U1.86
PE0: P3.44 U1.141 | length 1018.2
  Top Layer w10: U1.141 4295.08,3779.92 4700,3375 P3.44
PE1: P3.43 U1.142 | length 1151.4
  Top Layer w10: U1.142 4314.76,3825.24 4750,3390 4750,3300 P3.43
PE2: P3.46 U1.1 | length 1100.3
  Top Layer w10: U1.1 4465.43,4271.3 4800,3936.73 P3.46
PE3: P3.45 U1.2 | length 1263.1
  Top Layer w10: U1.2 4468.38,4290.98 4850,3909.36 4850,3310 4800,3260 P3.45
PE4: P3.48 U1.3 | length 1184.6
  Top Layer w10: U1.3 4471.32,4310.67 4900,3881.99 P3.48
PE5: P3.47 U1.4 | length 1347.4
  Top Layer w10: U1.4 4474.26,4330.35 4950,3854.61 4950,3325 4900,3275 P3.47
PE6: P3.50 U1.5 | length 1268.8
  Top Layer w10: U1.5 4477.2,4350.04 5000,3827.24 P3.50
PE7: P2.27 U1.58 | length 820.7
  Top Layer w10: P2.27 3900,5785 3940.75,5744.25 U1.58
PE8: P2.26 U1.59 | length 954
  Top Layer w10: P2.26 3859.47,5875.53 3859.47,5790.53 3921.06,5728.94 U1.59
PE9: P2.25 U1.60 | length 845.9
  Top Layer w10: P2.25 3800,5815 3901.38,5713.62 U1.60
PE10: P2.24 U1.63 | length 962.8
  Top Layer w10: P2.24 3759.47,5875.53 3759.47,5818.21 3842.32,5735.36 U1.63
PE11: P2.23 U1.64 | length 854.7
  Top Layer w10: P2.23 3822.64,5712.36 U1.64
PE12: P2.22 U1.65 | length 987.9
  Top Layer w10: P2.22 3659.47,5875.53 3659.47,5818.21 3802.95,5674.73 U1.65
PE13: P2.21 U1.66 | length 879.8
  Top Layer w10: P2.21 3783.27,5651.73 U1.66
PE14: P2.20 U1.67 | length 1013
  Top Layer w10: P2.20 3559.47,5875.53 3559.47,5818.21 3763.58,5614.1 U1.67
PE15: P2.19 U1.68 | length 904.9
  Top Layer w10: P2.19 3743.9,5591.1 U1.68
PF0: P3.54 U1.10 | length 1441.8
  Top Layer w10: U1.10 4428.17,4445.29 4455.41,4445.29 4458.59,4448.46 5060,3847.05 5060,3490 P3.54
PF1: P3.53 U1.11 | length 1610.8
  Top Layer w10: U1.11 4461.53,4468.15 5090,3839.68 5090,3540 5250,3380 5250,3285 5215,3250 P3.53
PF2: P3.56 U1.12 | length 1527.4
  Top Layer w10: U1.12 4471.32,4487.83 5120,3839.15 5120,3550 5300,3370 P3.56
PF3: P3.55 U1.13 | length 1690.2
  Top Layer w10: U1.13 4474.26,4507.52 5155,3826.78 5155,3575 5350,3380 5350,3325 5300,3275 P3.55
PF4: P3.58 U1.14 | length 1611.6
  Top Layer w10: U1.14 4477.2,4527.2 5185,3819.41 5185,3590 5400,3375 P3.58
PF5: P3.57 U1.15 | length 1774.5
  Top Layer w10: U1.15 4480.14,4546.89 5215,3812.03 5215,3620 5450,3385 5450,3300 P3.57
PF8: P2.58 U1.20 | length 1762.1
  Top Layer w10: U1.20 4471.32,4645.32 5450,5624 5450,5875 5400,5925 P2.58
PF9: P2.57 U1.21 | length 1599.3
  Top Layer w10: U1.21 4468.38,4665 5400,5596.62 P2.57
PF10: P2.56 U1.22 | length 1677.9
  Top Layer w10: U1.22 4465.43,4684.69 5350,5569.25 5350,5870 5300,5920 P2.56
PF11: P2.34 U1.49 | length 973.1
  Top Layer w10: U1.49 4117.91,5667.91 4242.5,5792.5 4242.5,5892.5 P2.34
PF12: P2.33 U1.50 | length 846
  Top Layer w10: U1.50 4098.23,5708.23 4200,5810 P2.33
PF13: P2.32 U1.53 | length 962.6
  Top Layer w10: U1.53 4039.17,5714.17 4140.53,5815.53 4140.53,5852.31 4140,5852.84 4140,5895 P2.32
PF14: P2.31 U1.54 | length 837.2
  Top Layer w10: U1.54 4019.49,5739.49 4100,5820 P2.31
PF15: P2.30 U1.55 | length 937.5
  Top Layer w10: U1.55 3999.8,5757.43 4040.53,5798.16 4040.53,5884.47 4000,5925 P2.30
PG0: P2.29 U1.56 | length 812.1
  Top Layer w10: U1.56 3980.12,5785.12 4000,5805 P2.29
PG1: P2.28 U1.57 | length 929.3
  Top Layer w10: P2.28 3940.53,5894.47 3940.53,5818.21 3940,5817.69 3940,5775 3960.43,5754.57 U1.57
PG2: P2.4 U1.87 | length 1666.8
  Top Layer w10: P2.4 2750,5885 2750,5765 3039.41,5475.59 3039.41,5160.88 3515.61,4684.69 U1.87
PG3: P2.3 U1.88 | length 1588.2
  Top Layer w10: P2.3 2700,5785 3019.72,5465.28 3019.72,5157.94 3512.67,4665 U1.88
PG4: P2.2 U1.89 | length 1751.1
  Top Layer w10: P2.2 2655,5880 2655,5795 3000.04,5449.96 3000.04,5155 3509.72,4645.32 U1.89
PG5: P2.1 U1.90 | length 1672.5
  Top Layer w10: P2.1 2600,5820.35 2980.35,5440 2980.35,5152.06 3506.78,4625.63 U1.90
PG6: P1.3 P3.4 P5.6 U1.91 | length 3703.6
  Top Layer w10: P1.3 2372,5197 2372,4263 P5.6 2700,3935 P3.4 ; U1.91 v1(3661,4605.94)
  Bottom Layer w10: P5.6 2458,4263 3616,4263 3676.5,4323.5 3676.5,4590.44 v1(3661,4605.94)
PG7: P1.4 P3.3 P5.5 U1.92 | length 4155.7
  Top Layer w10: P1.4 2240,5165 2240,4295 P5.5 2364,4171 2364,3512 2576,3300 2650,3300 P3.3 ; v1(3546,4586.26) U1.92
  Bottom Layer w10: P1.4 2358,5197 2358,4825 2757,4426 3385.74,4426 v1(3546,4586.26)
PG8: P1.8 P3.8 P5.1 U1.93 | length 4130
  Top Layer w10: U1.93 3635.43,4566.57 3658,4544 v1(3658,4397.5)
  Bottom Layer w10: P1.8 2256.5,5381.5 2256.5,4478.5 P5.1 ; P3.8 2833,3417 2620,3417 2360,3677 2360,3844 2272,3932 2272,4377 P5.1 ; v1(3658,4397.5) 2864.5,4397.5 2844,4377 2358,4377 P5.1
PG9: P3.30 U1.124 | length 866.8
  Top Layer w10: U1.124 3960.43,3389.57 P3.30
PG10: P3.29 U1.125 | length 1000.1
  Top Layer w10: U1.125 3980.12,3439.88 4050,3370 4050,3300 P3.29
PG11: P3.32 U1.126 | length 891.9
  Top Layer w10: U1.126 3999.8,3470.2 4100,3370 P3.32
PG12: P3.31 U1.127 | length 1029.3
  Top Layer w10: U1.127 4019.49,3510.51 4155,3375 4155,3305 P3.31
PG13: P3.34 U1.128 | length 917.1
  Top Layer w10: U1.128 4039.17,3535.83 4200,3375 P3.34
PG14: P3.33 U1.129 | length 1050.3
  Top Layer w10: U1.129 4058.86,3566.14 4250,3375 4250,3300 P3.33
PG15: P3.36 U1.132 | length 925.9
  Top Layer w10: U1.132 4117.91,3562.09 4300,3380 P3.36
RESET: C12.1 R2.2 SW1.1 U1.25 | length 1769
  Top Layer w10: v1(4377,4744) 4377.26,4743.74 U1.25 ; v1(5232.96,4744) 5394.96,4906 R2.2
  Top Layer w15: SW1.1@5306,5047 5306,5023.96 R2.2 ; SW1.1@5575.37,5049 5684.08,5049 C12.1
  Bottom Layer w10: v1(4377,4744) v1(5232.96,4744)
  Bottom Layer w15: SW1.1@5306,5047 5308,5049 SW1.1@5575.37,5049
VCC: 
VDDA: P2.48 U1.33 | length 1299.1
  Top Layer w10: U1.33 4471.32,4901.22 4950,5379.9 4950,5870 4900,5920 P2.48
VM: 
VREF+: P2.49 U1.32 | length 1220.5
  Top Layer w10: U1.32 4474.26,4881.54 5000,5407.28 P2.49
VREF-: P2.50 U1.31 | length 1387.5
  Top Layer w10: U1.31 4477.2,4861.85 5055,5439.65 5055,5865 5000,5920 P2.50
VSSA: P2.51 U1.30 | length 1304.7
  Top Layer w10: U1.30 4480.14,4842.17 5100,5462.02 P2.51
X1: C9.2 U1.23 X2.1 | length 957.1
  Top Layer w10: v1(4377,4704) 4377.37,4704.37 U1.23 ; v1(4909,4704) 5000,4795 X2.1
  Top Layer w15: X2.1 5000,5015.04 C9.2
  Bottom Layer w10: v1(4377,4704) v1(4909,4704)
X2: C8.2 U1.24 X2.3 | length 840.4
  Top Layer w10: U1.24 v1(4473,4724.06) ; v1(5060,4725) 5100,4725 X2.3 C8.2
  Bottom Layer w10: v1(4473,4724.06) 4473.94,4725 v1(5060,4725)
XT1: C6.2 U1.8 X1.1 | length 672.3
  Top Layer w10: U1.8 4471,4409.09 v1(4482.09,4398) ; v1(4792,4398) 4894.96,4295.04 X1.1 4989,4295.04 4989.04,4295 C6.2
  Bottom Layer w10: v1(4482.09,4398) v1(4792,4398)
XT2: C7.2 U1.9 X1.2 | length 718.8
  Top Layer w10: v1(4378.98,4429) 4379.2,4428.78 U1.9 ; v1(4740,4429) 4925.96,4429 X1.2 4989,4424.96 4989.04,4425 C7.2
  Bottom Layer w10: v1(4378.98,4429) v1(4740,4429)
pads on no net: U1.106 U2.0 U2.2 U2.3 U2.4 U2.5 U2.6 U2.7 U2.14 U2.15 U2.16 U2.17 U2.19 U2.21 U2.22 U6.2 U7.0 U7.4
copper on no net: | length 269.2
  Top Layer w10: 3594.29,4310.67 3634.72,4310.67 3751.77,4310.67 3755.46,4306.98 3862.01,4306.98

## Polygon pours and split planes (outlines as drawn)
GND on Top Layer "Top Layer-No Net" (solid, pour order 0): 2205,3180 2205,6010 5937.01,6010 5937.01,3180
GND on Bottom Layer "Top Layer-No Net1" (solid, pour order 1): 2205,3180 2205,6010 5937.01,6010 5937.01,3180

## Keep-outs
Keep-Out Layer:
  the board outline again, w11.81

## Dimensions
2205,3180 to 5937.01,3180 on Mechanical 1
2205,3180 to 2205,6010 on Mechanical 1

## Text inside footprints (layer, text, board x,y; h text height)
P2: Top Overlay "60" at 5580,5915 h30; Top Overlay "59" at 5580,5815 h30; Top Overlay "1" at 2500,5815 h30; Top Overlay "2" at 2500,5915 h30; Bottom Overlay "1" at 400,5815 h30
P3: Top Overlay "60" at 5580,3330 h30; Top Overlay "59" at 5580,3230 h30; Top Overlay "1" at 2500,3230 h30; Top Overlay "2" at 2500,3330 h30; Bottom Overlay "1" at 400,3230 h30